# EAGLE board audio_dac (EAGLE 8.4.3)
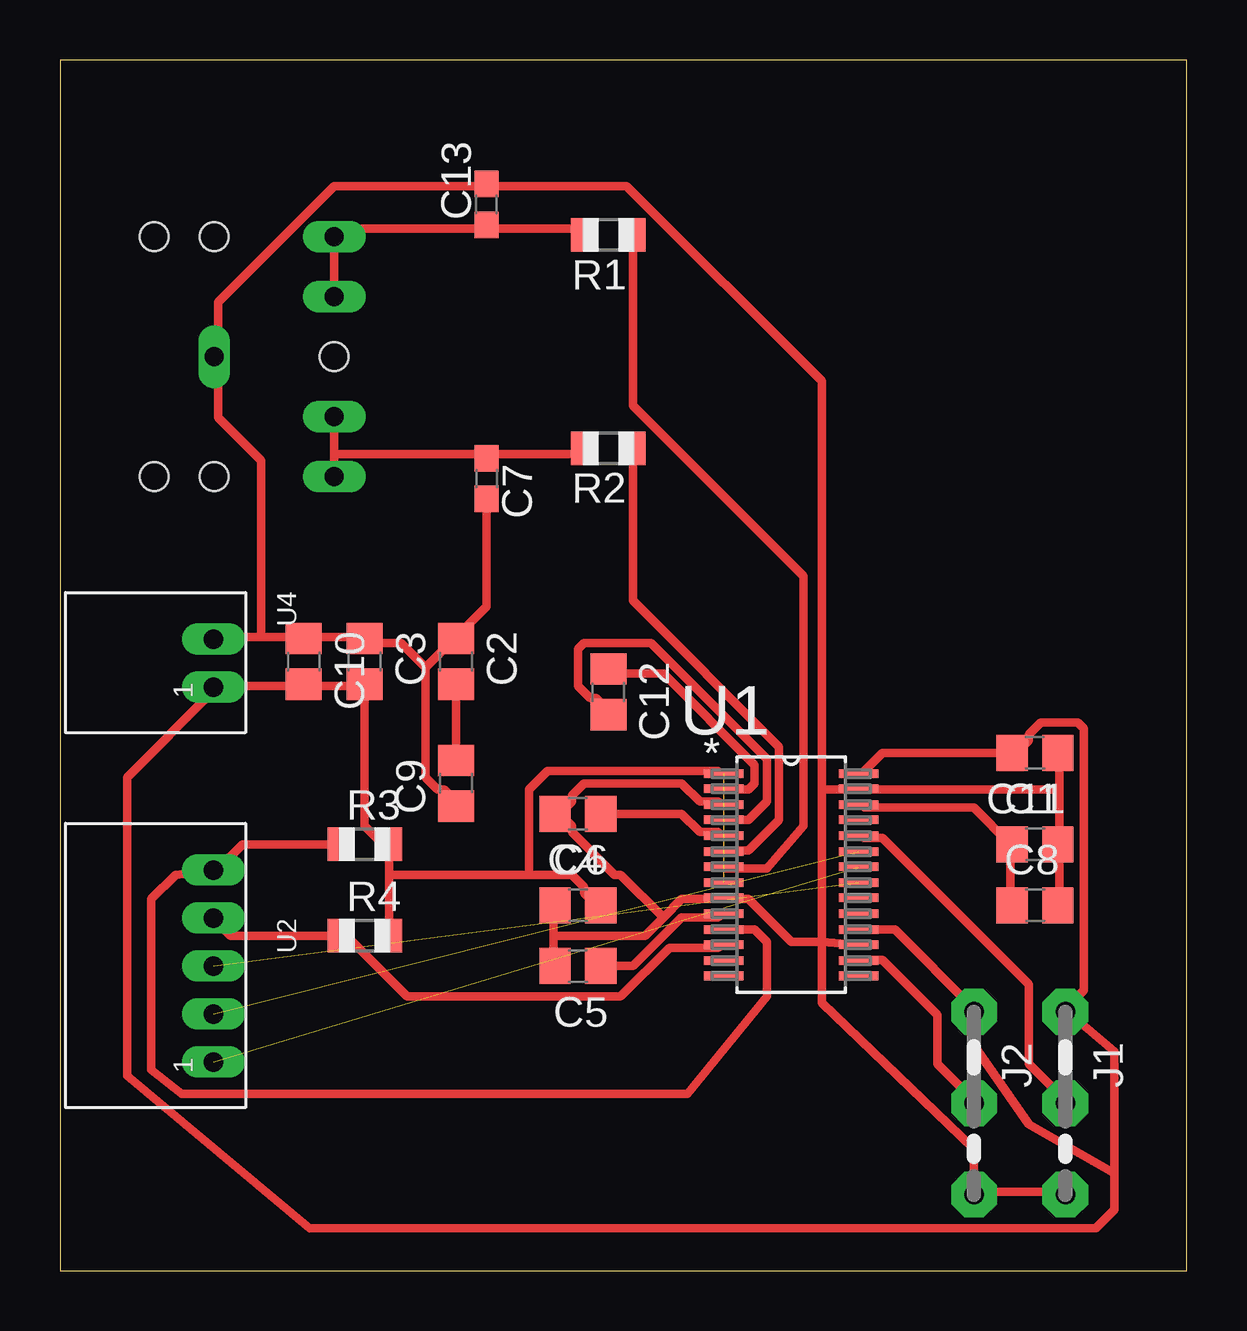
[diagram p0: board, top side]
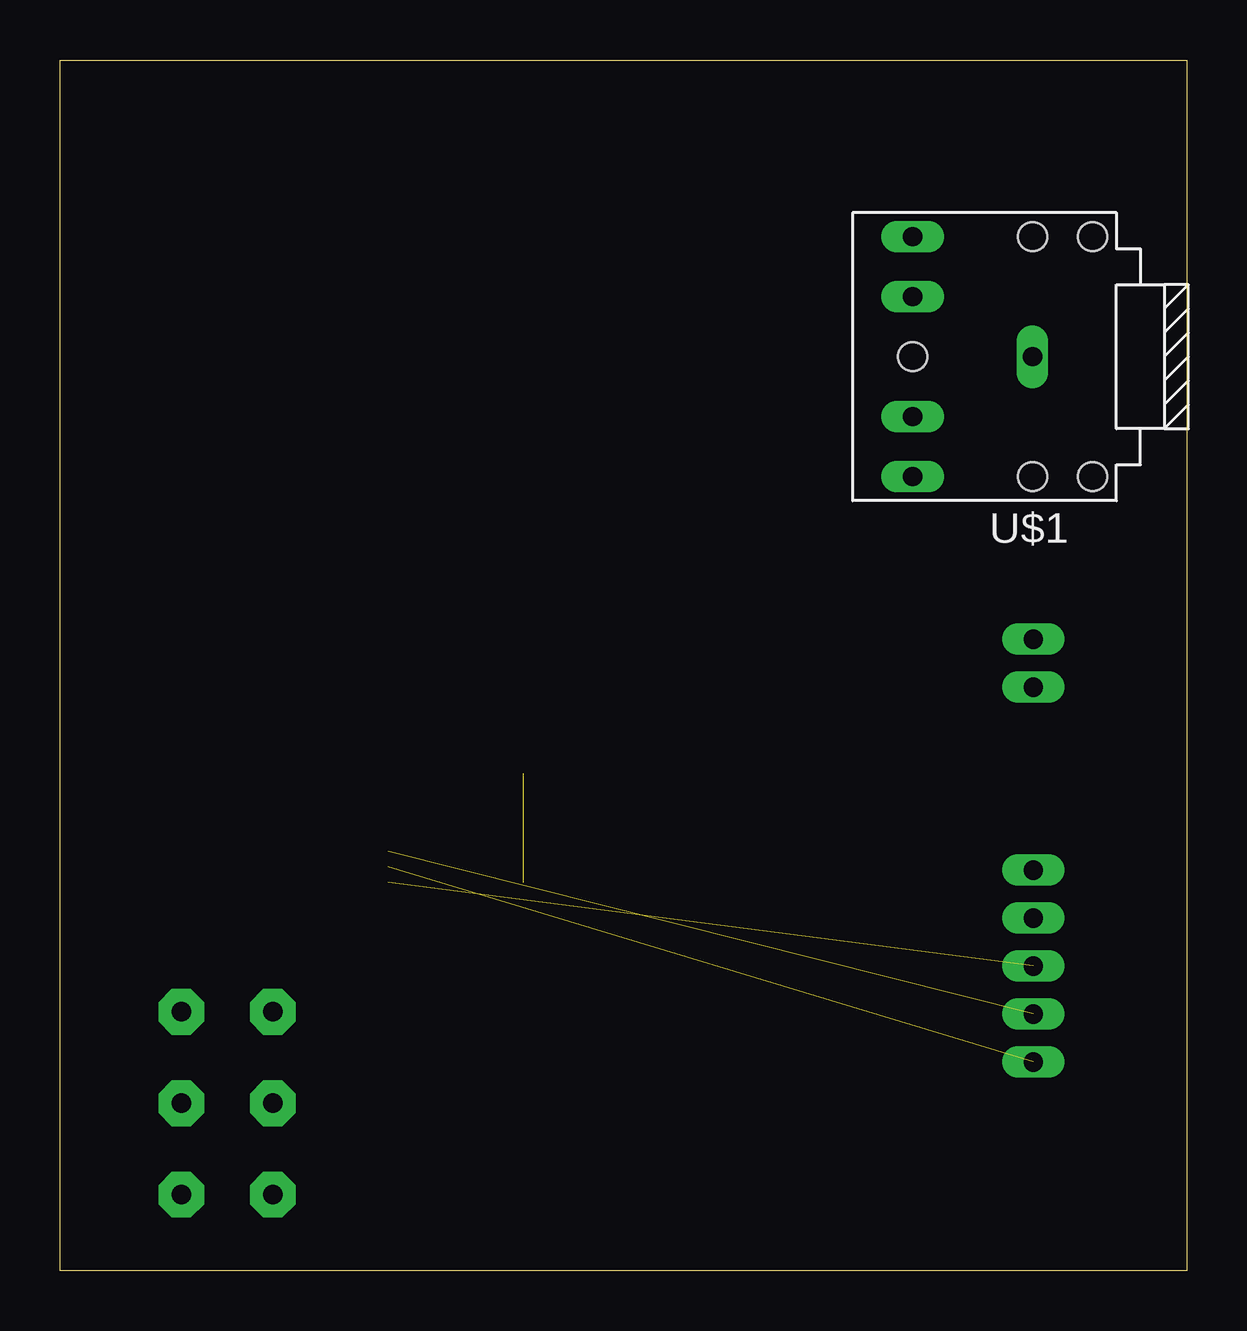
[diagram p1: board, bottom side, seen from below]

Size 46.97 x 50.47 mm. Coordinates in mm from the lower left corner, seen from the top.
Outline: 0,0 46.97,0 46.97,50.47 0,50.47 0,0
Copper layers (1*16): Top 0.035mm / dielectric 1.5mm / Bottom 0.035mm
Design rules "default *": minimum track width 6mil, minimum drill 0.35mm, track to track 6mil, track to pad 6mil, pad to pad 6mil, via to via 6mil, smd to smd 6mil, copper to edge 40mil, drill to drill 6mil, minimum pad ring 10mil, minimum via ring 8mil, stop-mask expansion 4mil, vias tented up to drill 0mil, thermal gap 10mil
Net classes: 0 default: width 0.356 mm

## Footprints (pad centres in the part's own frame; a part is rotated, then mirrored left to right if it is on the bottom)
C0805 = smd 1.3 x 1.5: 1 -0.95,0; 2 0.95,0
C0603 = smd 1.1 x 1: 1 -0.85,0; 2 0.85,0
04C = drill 0.813 pad 1.905 octagon: 1 -1.905,0; 2 1.905,0; 3 5.715,0
R0805 = smd 1.1 x 1.4: 1 -1,0; 2 1,0
SOP65P640X120-28N = smd 1.651 x 0.356: 1 -2.819,4.216; 2 -2.819,3.581; 3 -2.819,2.921; 4 -2.819,2.286; 5 -2.819,1.626; 6 -2.819,0.965; 7 -2.819,0.33; 8 -2.819,-0.33; 9 -2.819,-0.965; 10 -2.819,-1.626; 11 -2.819,-2.286; 12 -2.819,-2.921; 13 -2.819,-3.581; 14 -2.819,-4.216; 15 2.819,-4.216; 16 2.819,-3.581; 17 2.819,-2.921; 18 2.819,-2.286; 19 2.819,-1.626; 20 2.819,-0.965; 21 2.819,-0.33; 22 2.819,0.33; 23 2.819,0.965; 24 2.819,1.626; 25 2.819,2.286; 26 2.819,2.921; 27 2.819,3.581; 28 2.819,4.216
JST_B5B-PH_HEADER = drill 0.8 long: P1 4,0.048; P2 2,0.048; P3 0,0.048; P4 -2,0.048; P5 -4,0.048
JST_B2B-PH_HEADER = drill 0.8 long: P1 1.075,0.048; P2 -0.925,0.048
FC68131-5P = drill 0.8 long: 1 -5,0; 2 0,-5; 3 0,-2.5; 4 0,2.5; 5 0,5 | hole 1.2: 0,0; -5,-5; -5,5; -7.5,5; -7.5,-5

## Placement (x,y rotation side)
C1  10uF  [C0805]  40.64,17.78 0 top
C2  10uF  [C0805]  16.51,25.4 270 top
C3  10uF  [C0805]  12.7,25.4 270 top
C4  10uF  [C0805]  21.59,15.24 0 top
C5  10uF  [C0805]  21.59,12.7 180 top
C6  2.2uF  [C0805]  21.59,19.05 180 top
C7  2.2uF  [C0603]  17.78,33.02 270 top
C8  0.1uF  [C0805]  40.64,15.24 0 top
C9  0.1uF  [C0805]  16.51,20.32 90 top
C10  0.1uF  [C0805]  10.16,25.4 270 top
C11  0.1uF  [C0805]  40.64,21.59 180 top
C12  2.2nF  [C0805]  22.86,24.13 270 top
C13  2.2nF  [C0603]  17.78,44.45 90 top
J1  [04C]  41.91,8.89 270 top
J2  [04C]  38.1,8.89 270 top
R1  470R  [R0805]  22.86,43.18 180 top
R2  470R  [R0805]  22.86,34.29 180 top
R3  10k  [R0805]  12.7,17.78 0 top
R4  10k  [R0805]  12.7,13.97 0 top
U1  PCM5122PW  [SOP65P640X120-28N]  30.48,16.51 0 top
U2  I2S AND I2C  [JST_B5B-PH_HEADER]  6.35,12.7 270 top
U4  PWR  [JST_B2B-PH_HEADER]  6.35,25.4 270 top
U$1  FC68131  [FC68131-5P]  11.43,38.1 180 bottom

## Library data of the parts
C1-C13 = rcl
J1 J2 = jumper
R1-R4 = adafruit
U1 = pcm5122; MPN: PCM5122PW; OC_FARNELL: 2307931; OC_NEWARK: 55W7071; PACKAGE: TSSOP-28; SUPPLIER: TEXAS INSTRUMENTS
U2 U4 = SRG
U$1 = con-cliff

## Nets
3.3V: C2.2 C9.2
ADDR1: J1.2 U1.24
ADDR2: J2.2 U1.16
BCK: U1.21 U2.P3
DIN: U1.22 U2.P1
GND: C1.2 C2.1 C3.1 C4.1 C5.2 C6.2 C7.2 C8.2 C9.1 C10.1 C11.1 C13.2 J1.3 J2.3 U1.3 U1.9 U1.17 U1.27 U4.P2 U$1.1
LRCK: U1.23 U2.P2
N$1: C1.1 C8.1 U1.26
N$2: C12.2 U1.4
N$3: C6.1 U1.5
N$6: C12.1 U1.2
N$7: C13.1 R1.2 U$1.2 U$1.3
N$8: C7.1 R2.2 U$1.4 U$1.5
OUTL: R2.1 U1.6
OUTR: R1.1 U1.7
SCL: R4.1 U1.12 U2.P4
SDA: R3.1 U1.11 U2.P5
VCC: C3.2 C4.2 C10.2 C11.2 J1.1 J2.1 R3.2 R4.2 U1.1 U1.8 U1.18 U1.28 U4.P1
VCOM: C5.1 U1.10

## Tracks (layer width: path | path; a pad name or v marks a point on that pad's centre or on a via)
3.3V
  Top 0.356: C2.2 C9.2
ADDR1
  Top 0.356: U1.24 33.53,18.03 34.29,18.03 40.39,11.94 40.39,8.64 41.91,7.11 J1.2
ADDR2
  Top 0.356: U1.16 33.53,12.95 34.29,12.95 36.58,10.67 36.58,8.64 38.1,7.11 J2.2
BCK  (1 unrouted)
DIN  (1 unrouted)
GND
  Top 0.356: 17.78,45.21 11.43,45.21 6.6,40.39 6.6,38.1 | 10.16,26.42 12.7,26.42 C3.1 12.7,26.16 14.22,26.16 15.24,25.15 | C7.2 17.78,27.69 16.51,26.42 | 15.24,25.15 15.24,20.57 15.75,20.07 16,20.07 16.51,19.56 C9.1 | 16.51,26.42 15.24,25.15 | 16.51,26.42 C2.1 | 10.16,26.42 8.38,26.42 | 8.38,26.42 6.6,26.42 U4.P2 | 10.16,26.42 C10.1 | 6.6,38.1 6.6,35.56 8.38,33.78 8.38,26.42 | 6.6,38.1 U$1.1 | 38.1,3.3 41.91,3.3 J1.3 | 20.83,19.05 21.34,19.56 21.34,19.81 21.84,20.32 25.91,20.32 26.67,19.56 27.43,19.56 U1.3 | 41.66,17.78 41.66,15.24 C8.2 | 41.66,17.78 41.66,20.07 | 41.66,20.07 41.66,21.59 C11.1 | 41.66,17.78 C1.2 | 20.57,13.97 20.57,15.24 C4.1 | 20.57,13.97 20.57,12.7 C5.2 | 31.75,13.72 30.48,13.72 28.7,15.49 27.69,15.49 U1.9 27.43,15.49 25.91,15.49 25.15,14.73 | 31.75,20.07 33.27,20.07 U1.27 33.53,20.07 41.66,20.07 | 31.75,13.72 31.75,20.07 | 20.57,13.97 24.38,13.97 25.15,14.73 | 20.83,19.05 21.34,18.54 21.34,18.29 23.11,16.51 23.37,16.51 25.15,14.73 | 20.83,19.05 C6.2 | 38.1,3.3 38.1,5.08 31.75,11.18 31.75,13.72 | 38.1,3.3 J2.3 | 17.78,45.21 23.62,45.21 31.75,37.08 31.75,20.07 | 17.78,45.21 C13.2 | U1.17 31.75,13.72
LRCK  (1 unrouted)
N$1
  Top 0.356: 39.62,17.78 39.62,15.24 C8.1 | 39.62,17.78 38.1,19.3 33.53,19.3 U1.26 | 39.62,17.78 C1.1
N$2
  Top 0.356: U1.4 28.7,18.8 29.46,19.56 29.46,21.34 24.64,26.16 21.84,26.16 21.59,25.91 21.59,24.38 22.1,23.88 22.35,23.88 22.86,23.37 C12.2
N$3
  Top 0.356: C6.1 25.91,19.05 26.67,18.29 27.43,18.29 U1.5
N$6
  Top 0.356: C12.1 22.86,24.89 25.15,24.89 28.96,21.08 28.96,20.32 28.7,20.07 27.69,20.07 U1.2
N$7
  Top 0.356: 17.78,43.43 21.59,43.43 21.84,43.18 R1.2 | U$1.3 U$1.2 11.43,43.18 11.68,43.43 17.78,43.43 | 17.78,43.43 C13.1
N$8
  Top 0.356: 17.78,34.04 21.59,34.04 21.84,34.29 R2.2 | U$1.4 11.43,34.04 | 11.43,34.04 U$1.5 | 11.43,34.04 17.78,34.04 | 17.78,34.04 C7.1
OUTL
  Top 0.356: R2.1 23.88,34.29 23.88,27.94 29.97,21.84 29.97,18.8 28.7,17.53 27.69,17.53 U1.6
OUTR
  Top 0.356: R1.1 23.88,43.18 23.88,36.07 30.99,28.96 30.99,18.54 29.46,16.76 27.69,16.76 U1.7
SCL
  Top 0.356: U2.P4 6.6,14.48 7.11,13.97 R4.1 11.94,13.97 14.48,11.43 23.37,11.43 25.4,13.46 27.43,13.46 U1.12
SDA
  Top 0.356: R3.1 7.62,17.78 6.6,16.76 U2.P5 4.83,16.51 3.81,15.49 3.81,8.38 5.08,7.37 26.16,7.37 29.46,11.43 29.46,13.72 28.96,14.22 U1.11
VCC  (1 unrouted)
  Top 0.356: U1.28 33.53,20.83 34.29,21.59 C11.2 39.88,21.59 40.39,22.1 40.39,22.35 40.89,22.86 42.42,22.86 42.67,22.61 42.67,11.68 41.91,10.92 J1.1 42.16,10.67 43.94,9.14 43.94,4.06 | U1.18 34.8,14.22 38.1,10.92 J2.1 38.1,9.4 40.39,6.1 43.94,4.06 | 12.7,24.38 10.16,24.38 | 10.16,24.38 6.6,24.38 U4.P1 6.35,24.13 2.79,20.57 2.79,8.13 10.41,1.78 43.18,1.78 43.94,2.54 43.94,3.05 43.94,4.06 | 10.16,24.38 C10.2 | 13.72,16.51 13.72,17.78 R3.2 13.46,17.78 12.7,18.54 12.7,24.38 | 13.72,16.51 13.72,13.97 R4.2 | 13.72,16.51 19.56,16.51 | 19.56,16.51 21.34,16.51 21.84,16 21.84,15.75 22.35,15.24 C4.2 | 19.56,16.51 19.56,20.07 20.32,20.83 27.43,20.83 U1.1 | 12.7,24.38 C3.2
VCOM
  Top 0.356: C5.1 23.88,12.7 25.91,14.73 27.43,14.73 U1.10